# EAGLE board shift-one (EAGLE 5.07)
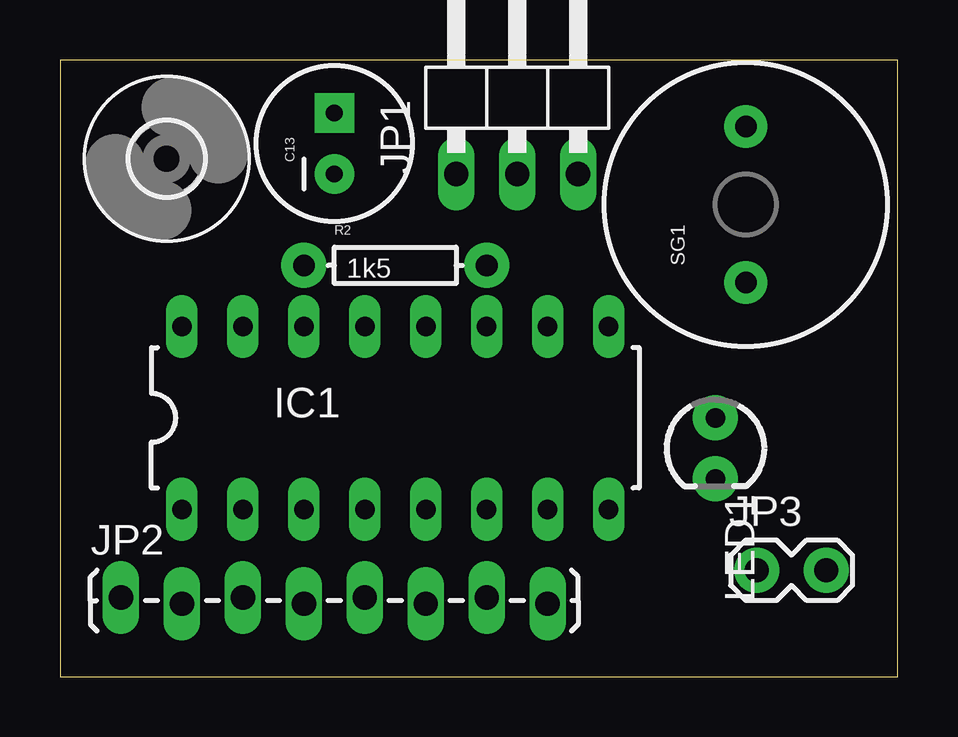
[diagram p0: board, top side]
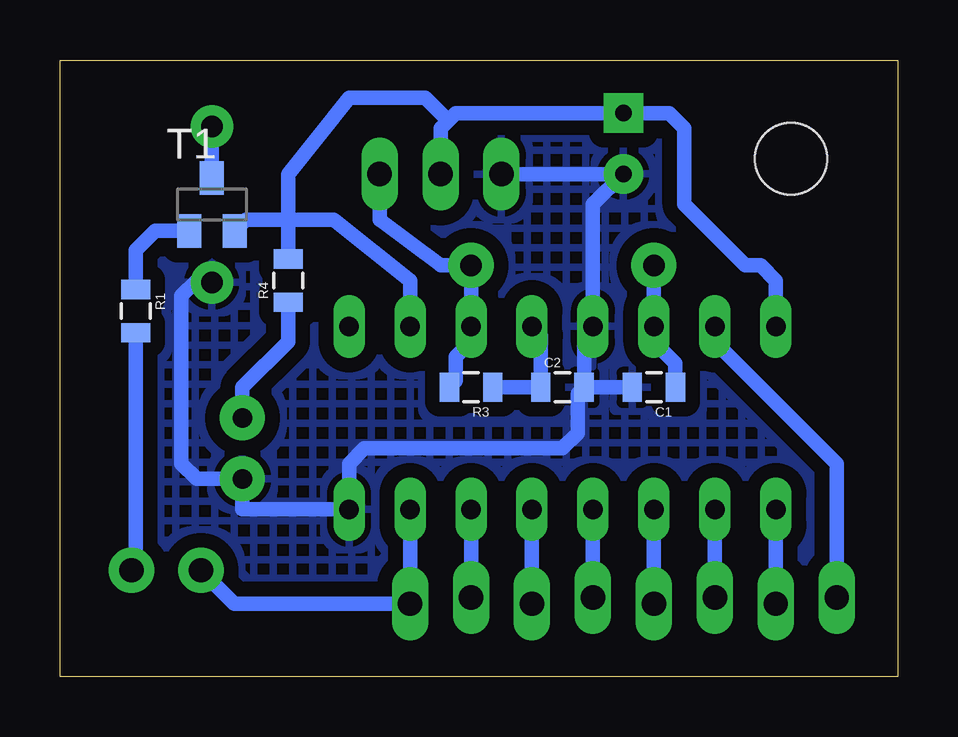
[diagram p1: board, bottom side, seen from below]

Size 34.91 x 25.7 mm. Coordinates in mm from the lower left corner, seen from the top.
Outline: 0,0 34.91,0 34.91,25.7 0,25.7 0,0
Copper layers (1*16): Top 0.035mm / dielectric 1.5mm / Bottom 0.035mm
Design rules "default": minimum track width 10mil, minimum drill 24mil, track to track 8mil, track to pad 8mil, pad to pad 8mil, via to via 8mil, smd to smd 8mil, copper to edge 40mil, drill to drill 8mil, minimum pad ring 10mil, minimum via ring 8mil, stop-mask expansion 4mil, vias tented up to drill 0mil, thermal gap 10mil

## Footprints (pad centres in the part's own frame; a part is rotated, then mirrored left to right if it is on the bottom)
0805 = smd 0.8 x 1.2: 1 -0.9,0; 2 0.9,0
CPOL-RADIAL-100UF-25V = drill 0.7 pad 1.651 square: 1 1.27,0 | drill 0.7 pad 1.651 round: 2 -1.27,0
3,0 = hole 3: 0,0
DIL16 = drill 0.813 long: 1 -8.89,-3.81; 2 -6.35,-3.81; 3 -3.81,-3.81; 4 -1.27,-3.81; 5 1.27,-3.81; 6 3.81,-3.81; 7 6.35,-3.81; 8 8.89,-3.81; 9 8.89,3.81; 10 6.35,3.81; 11 3.81,3.81; 12 1.27,3.81; 13 -1.27,3.81; 14 -3.81,3.81; 15 -6.35,3.81; 16 -8.89,3.81
1X03/90 = drill 1.016 long: 1 -2.54,-3.81; 2 0,-3.81; 3 2.54,-3.81
1X08_LOCK_LONGPADS = drill 1.016 long: 1 0,0.127; 2 2.54,-0.127; 3 5.08,0.127; 4 7.62,-0.127; 5 10.16,0.127; 6 12.7,-0.127; 7 15.24,0.127; 8 17.78,-0.127
1X02_LOCK = drill 1.016 pad 1.88 round: 1 -0.178,0; 2 2.718,0
LED3MM = drill 0.813 pad 1.88 round: A -1.27,0; K 1.27,0
AXIAL-0.3 = drill 0.9 pad 1.88 round: P$1 -3.81,0; P$2 3.81,0
BUZZER-12MM = drill 0.9 pad 1.778 round: + 3.25,0; - -3.25,0
SOT23-BEC = smd 1 x 1.4: B -0.95,-1.1; C 0,1.1; E 0.95,-1.1

## Placement (x,y rotation side)
C1  222  [0805]  10.16,12.06 180 bottom
C2  222  [0805]  13.97,12.06 0 bottom
C13  10u  [CPOL-RADIAL-100UF-25V]  11.43,22.23 90 top
H1  MOUNT-HOLE3.0  [3,0]  4.45,21.59 0 top
IC1  74LS595N  [DIL16]  13.97,10.79 0 top
JP1  [1X03/90]  19.05,24.77 0 top
JP2  [1X08_LOCK_LONGPADS]  2.54,3.17 0 top
JP3  [1X02_LOCK]  29.21,4.45 0 top
LED1  RED  [LED3MM]  27.3,9.53 270 top
R1  2.2k  [0805]  31.75,15.24 270 bottom
R2  1k5  [AXIAL-0.3]  13.97,17.14 0 top
R3  33k  [0805]  17.78,12.06 180 bottom
R4  500  [0805]  25.4,16.51 90 bottom
SG1  BUZZERPTH  [BUZZER-12MM]  28.57,19.68 90 top
T1  [SOT23-BEC]  28.57,19.68 0 bottom

## Library data of the parts
C1 C2 LED1 R1-R4 SG1 T1 = digital-toy
C13 IC1 JP2 JP3 = SparkFun
H1 = holes
JP1 = pinhead

## Nets
GND: C1.2 C2.2 C13.2 IC1.8 IC1.13 JP1.1 LED1.K SG1.-
N$1: IC1.15 JP2.1
N$2: IC1.1 JP2.2
N$3: IC1.2 JP2.3
N$4: IC1.3 JP2.4
N$5: IC1.4 JP2.5
N$6: IC1.5 JP2.6
N$7: IC1.6 JP2.7
N$9: IC1.11 JP1.3 R2.P$2 R3.2
N$10: C2.1 IC1.12 R3.1
N$11: C1.1 IC1.14 R2.P$1
N$12: LED1.A R4.1
N$13: SG1.+ T1.C
N$14: R1.1 T1.B
N$15: JP3.2 R1.2
N$16: IC1.7 JP2.8 JP3.1
VCC: C13.1 IC1.10 IC1.16 JP1.2 R4.2 T1.E

## Tracks (layer width: path | path; a pad name or v marks a point on that pad's centre or on a via)
GND
  Bottom 0.61: C2.2 13.34,11.8 13.34,10.16 13.97,9.53 22.23,9.53 22.86,8.89 IC1.8 27.3,6.99 LED1.K 29.21,8.26 29.84,8.89 29.84,15.88 29.21,16.51 28.65,16.51 SG1.- | C1.2 C2.2 | C2.2 13.07,14.23 IC1.13 12.7,19.68 C13.2 JP1.1
  pour Bottom (isolate 0.61, hatched): -4.45,30.48 36.83,30.48 42.55,24.77 42.55,1.27 34.29,-6.99 0.64,-6.99 -6.99,0.64 -6.99,27.94
N$1
  Bottom 0.61: IC1.15 7.62,13.97 2.54,8.89 JP2.1
N$2
  Bottom 0.61: JP2.2 IC1.1
N$3
  Bottom 0.61: JP2.3 IC1.2
N$4
  Bottom 0.61: JP2.4 IC1.3
N$5
  Bottom 0.61: JP2.5 IC1.4
N$6
  Bottom 0.61: JP2.6 IC1.5
N$7
  Bottom 0.61: JP2.7 IC1.6
N$9
  Bottom 0.61: R3.2 18.41,12.33 18.41,13.34 17.78,13.97 IC1.11 R2.P$2 19.05,17.14 21.59,19.05 JP1.3
N$10
  Bottom 0.61: IC1.12 14.87,14.23 C2.1 R3.1
N$11
  Bottom 0.61: C1.1 9.26,13.07 10.16,13.97 IC1.14 R2.P$1
N$12
  Bottom 0.61: LED1.A 27.3,12.06 25.4,13.97 R4.1
N$13
  Bottom 0.61: T1.C SG1.+
N$14
  Bottom 0.254: R1.1 31.75,16.51 | T1.B 29.21,19.05
  Bottom 0.61: T1.B 30.95,18.59 31.75,17.78 R1.1
N$15
  Bottom 0.254: JP3.2 31.75,5.08
  Bottom 0.61: 31.75,5.08 R1.2
N$16
  Bottom 0.61: IC1.7 JP2.8 27.64,3.05 JP3.1
VCC
  Bottom 0.61: IC1.16 5.08,16.51 5.71,17.14 6.35,17.14 8.89,19.68 8.89,22.86 9.53,23.5 C13.1 18.41,23.5 18.73,23.18 | 18.73,23.18 19.05,22.86 JP1.2 | IC1.10 20.32,16.51 23.5,19.05 25.4,19.05 | 25.4,19.05 25.4,20.95 22.86,24.13 19.68,24.13 18.73,23.18 | 25.4,19.05 R4.2 | T1.E 27.16,19.05 25.4,19.05